# Altium PCB payload.PcbDoc
Units mm, origin at the board's own origin, x right, y up, seen from the top; angles counter-clockwise.
Board outline 30 x 30 mm, 2 copper layers (Top Layer, Bottom Layer); 13 components, 9 nets, 39 pads, 7 vias.
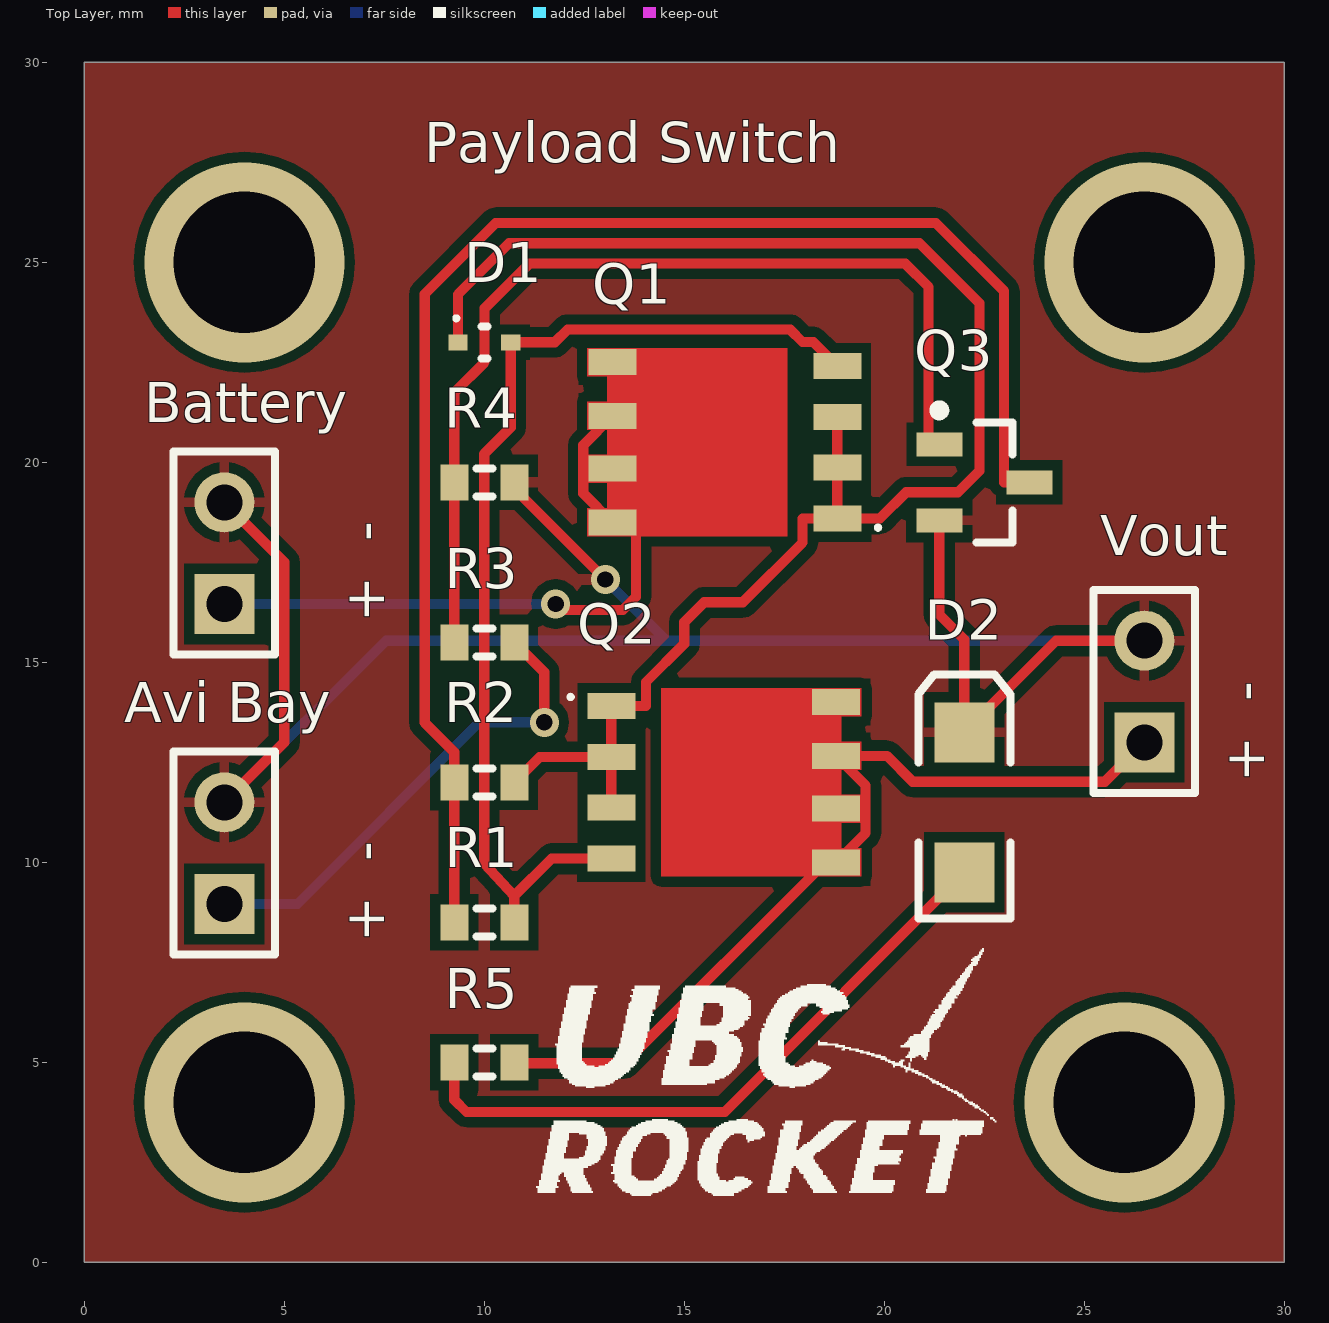
[diagram p0: Top Layer view]
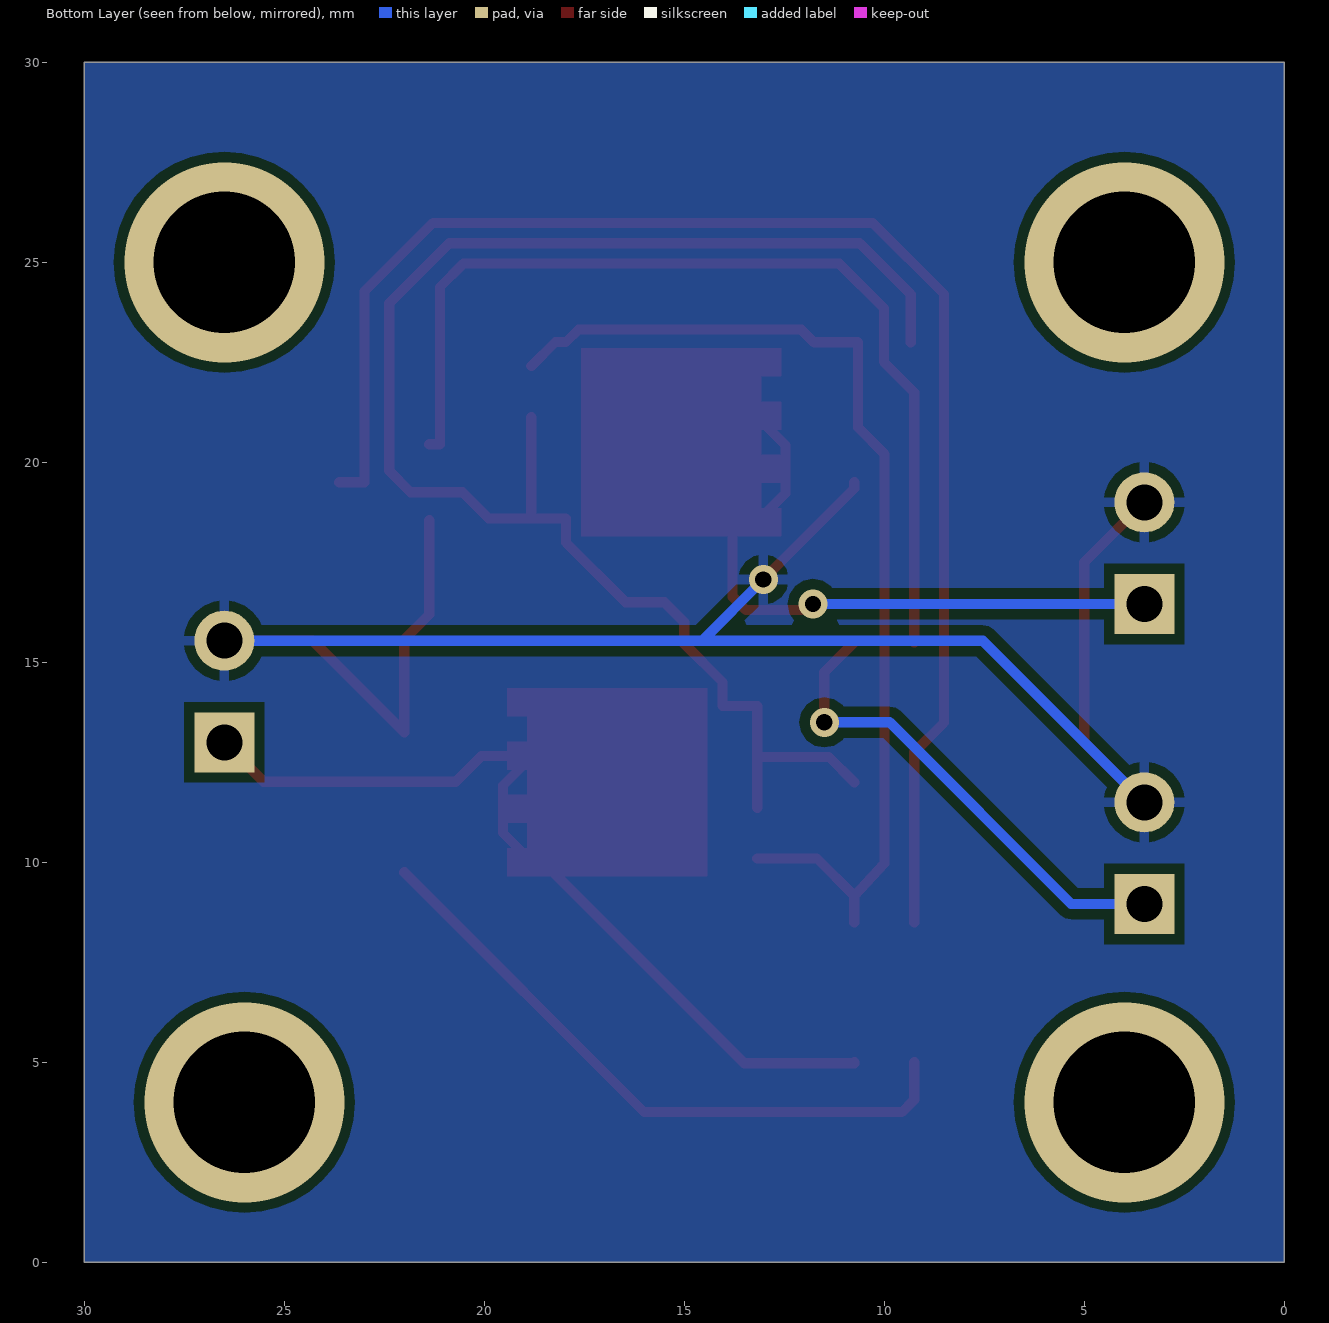
[diagram p1: Bottom Layer view, seen from below]

## Layer stack, top to bottom
Top Solder: solder mask 0.0102, Solder Resist, Dk 3.5
Top Layer: signal copper 0.0356
Dielectric 1: dielectric 0.32, FR-4, Dk 4.8
Bottom Layer: signal copper 0.0356
Bottom Solder: solder mask 0.0102, Solder Resist, Dk 3.5

## Board outline
0,0 30,0 30,30 0,30

## Design rules (kind name [scope] priority, off if disabled: settings)
Clearance [All] p1: gap=0.254 ignorepadtopadclearanceinfootprint=FALSE except(0: Arc-Hole Track-Hole SMDPad-Hole THPad-Hole Via-Hole Fill-Hole Poly-Hole Region-Hole Text-Hole)
PolygonConnect [All] p1: connectstyle=Relief reliefconductorwidth=0.254 reliefentries=4 polygonreliefangle="90 Angle" airgapwidth=0.254
RoutingVias [All] p1: holewidth=0.406 width=0.725 viastyle="Through Hole" minholewidth=0.406 minwidth=0.725 maxholewidth=0.406 maxwidth=0.725
SolderMaskExpansion [All] p1: expansion=0.102
Width [All] p1: maxlimit=0.254 minlimit=0.254 preferedwidth=0.254
30 further rules are at their usual default settings.

## Components (designator, comment, footprint, x,y, rotation, side; value= is the part's Value field where it differs from the comment)
"Avi Bay" "Header 2" HDR1X2 3.5,8.96 r90 top (schematic designator P3)
Battery "Header 2" HDR1X2 3.5,16.46 r90 top (schematic designator P1)
D1 "ZMM5Z18VT1G" ONSC-SOD-523-2-502-01_V 10,23 r0 top
D2 "LED2" 3.2X1.6X1.1 22,11.5 r90 top
Q1 "BSC030P03NS3 G" INF-PG-TDSON-8-1_V 16,20.5 r90 top
Q2 "BSC030P03NS3 G" INF-PG-TDSON-8-1_V 16,12 r270 top
Q3 "BC817-25" SOT-23A_N 22.5,19.5 r0 top
R1 "Res3" J1-0603 10,8.5 r0 top value=100K
R2 "Res3" J1-0603 10,12 r0 top value=100K
R3 "Res3" J1-0603 10,15.5 r180 top value=10K
R4 "Res3" J1-0603 10,19.5 r0 top value=10K
R5 "Res3" J1-0603 10,5 r0 top value=100K
Vout "Header 2" HDR1X2 26.5,13 r90 top (schematic designator P2)

## Footprints (in the part's own frame and the unit in brackets; to place one, negate y for a bottom-side part, rotate by r counter-clockwise, add the part's x,y. Pads: shape width x height; smd on the part's side, far side on the other; paste and mask are expansions set on the pad)
3.2X1.6X1.1 [mm] "SMT LED; 2 Flat Leads"
  rect 1.5x1.5 smd: 1(-1.75,0) 2(1.75,0)
  silkscreen extent -2.9,-1.15 3.2,1.15
HDR1X2 [mm] "Connector; Header; 2 Position"
  rect 1.5x1.5 hole 0.9: 1(0,0)
  round 1.5 hole 0.9: 2(2.54,0)
  silkscreen extent -1.27,-1.27 3.81,1.27
INF-PG-TDSON-8-1_V [mm] "TDSON, 8-Leads, Body 6.15x5.15mm, Pitch 1.27mm"
  rect 0.65x1.2 smd: 1(-1.905,-2.825) 2(-0.635,-2.825) 3(0.635,-2.825) 4(1.905,-2.825) 5(2.007,2.794) 6(0.66,2.794) 7(-0.66,2.794) 8(-2.007,2.794)
  Top Layer region: 0.315,2.925 1.015,2.925 1.015,3.425 0.315,3.425
  Top Layer region: -1.015,2.925 -0.315,2.925 -0.315,3.425 -1.015,3.425
  Top Layer region: 1.65,2.925 2.35,2.925 2.35,3.425 1.65,3.425
  Top Layer region: -2.35,2.925 -1.65,2.925 -1.65,3.425 -2.35,3.425
  Top Layer region: -2.35,2.925 -2.35,-1.575 2.35,-1.575 2.35,2.925
  silkscreen extent -2.23,-3.94 -2.03,-3.74, body extent -2.58,-3.08 2.58,3.08, height 1
J1-0603 [mm] "Chip Resistor, Body 1.6x0.8mm, IPC High Density"
  rect 0.7x0.9 smd: 1(-0.75,0) 2(0.75,0)
  silkscreen extent -0.2,-0.35 0.2,0.35, body extent -0.85,-0.48 0.85,0.48, height 0.9
ONSC-SOD-523-2-502-01_V [mm] "SOD, 2-Leads, Body 1.2x0.8mm"
  rect 0.48x0.4 smd: 1(-0.66,0) 2(0.66,0)
  silkscreen extent -0.75,-0.4 0.07,0.65, body extent -0.6,-0.4 0.6,0.4, height 0.7
SOT-23A_N [mm] "SOT23, 3-Leads, Body 2.9x1.3mm, Pitch 0.95mm, Lead Span 2.3mm, IPC Medium Density"
  rect 1.15x0.6 smd: 1(-1.125,0.95) 2(-1.125,-0.95) 3(1.125,0)
  silkscreen extent -1.25,-1.5 0.7,1.92, body extent -0.7,-1.5 0.7,1.5, height 1.09

## Part data
"Avi Bay" Battery Vout: "Header, 2-Pin", LatestRevisionDate=17-Jul-2002, LatestRevisionNote="Re-released for DXP Platform.", Publisher="Altium Limited"
D1: "Zener Voltage Regulator, 500 mW, 2-Pin SOD-523, Pb-Free, Tape and Reel", Manufacturer="On Semiconductor", ComponentLink1Description="Manufacturer URL", ComponentLink1URL=http://www.onsemi.com/, ComponentLink2Description=Datasheet, ComponentLink2URL=http://www.onsemi.cn/pub_link/Collateral/MM5Z2V4T1-D.PDF, ComponentLink3Description="Package Specification", ComponentLink3URL=http://www.onsemi.com/pub_link/Collateral/502-01.PDF, DatasheetVersion="Rev. 10", Mounting Technology="Surface Mount", PackageDescription="2-Pin SOD, Body 1.2 x 0.8 mm", PackageReference=SOD-523-2-502-01, PackageVersion="Rev. E, 09/2010", Packing="Tape and Reel", PartNumber=ZMM5Z18VT1G, P Max (W)=0.5, RoHS=Pb-Free, VZ Typ (V)=18
D2: "Typical RED, GREEN, YELLOW, AMBER GaAs LED", LatestRevisionDate=17-Jul-2002, LatestRevisionNote="Re-released for DXP Platform.", PackageDescription="SM LED; 2 Flat Leads", PackageReference=3.2X1.6X1.1, PackageVersion=Feb-2002, Published=8-Jun-2000, Publisher="Altium Limited"
Q1 Q2: "P-Channel OptiMOS P3 Power-Transistor, -30 V VDS, -100 A ID, -55 to 150 degC, PG-TDSON-8-1, Reel, Green", Manufacturer=Infineon, Supplier Part Number 1=726-BSC030P03NS3G, ComponentLink1Description="Manufacturer URL", ComponentLink1URL=http://www.infineon.com/, ComponentLink2Description=Datasheet, ComponentLink2URL=http://www.infineon.com/dgdl/BSC030P03NS3+G_2.1.pdf?folderId=db3a304314dca38901154a72e3951a65&fileId=db3a30431d8a6b3c011d90d084910435, ComponentLink3Description="Package Specification", ComponentLink3URL=http://www.infineon.com/cms/packages/SMD_-_Surface_Mounted_Devices/P-PG-TDSON/P-PG-TDSON-08-01x_2x_3.html?__locale=en, DatasheetVersion="Rev. 2.1", Green=TRUE, Halogen-free=TRUE, ID (max)="-100 A", IDpuls (max)="-200 A", Mounting Technology="Surface Mount", PackageDescription="8-Pin Plastic (Green) Thin Dual Small Outline Non-Leaded Package, 5.15 x 5.9 mm Body, 1.27 mm Pitch", PackageReference=PG-TDSON-8-1, Packing=Reel, PartNumber="BSC030P03NS3 G", Pto t (max)="125 W", QG="137 nC", RDS (on) (max)="3 mOhm", Rth="1 K/W", RthJC (max)="1 K/W", Supplier 1=Mouser, Supplier 2=Digi-Key, Supplier 3=Digi-Key, Supplier 4=Digi-Key, Supplier Part Number 2="BSC030P03NS3 GTR-ND", Supplier Part Number 3="BSC030P03NS3 GCT-ND", Supplier Part Number 4="BSC030P03NS3 GDKR-ND", VDS (max)="-30 V", VGS(th) (max)="-1.9 V", VGS(th) (min)="-3.1 V"
Q3: "NPN General Purpose Amplifier", ComponentLink1Description="Manufacturer Link", ComponentLink1URL=http://www.fairchildsemi.com/, ComponentLink2Description="Discontinuation Notice", ComponentLink2URL=http://www.fairchildsemi.com/obsolete/obs.jsp, DatasheetVersion=1997, LatestRevisionDate=20-Nov-2009, LatestRevisionNote="IPC-7351 Footprint Added.", PackageDescription="3-Pin SOT-23 Package 0.95 mm Pitch, 2.3 mm Lead Span", PackageReference=SOT-23A, PackageVersion=Sep-1998, Published=8-Jun-2000, Publisher="Altium Limited"
R1 R2 R3 R4 R5: "Resistor", LatestRevisionDate=29-May-2009, LatestRevisionNote="IPC-7351 Footprint Added.", PackageDescription="Chip Resistor", PackageReference=J1-0603, Published=8-Jun-2000, Publisher="Altium Limited"

## Via types
v1: diameter 5, hole 3.54, Top Layer to Bottom Layer, 4 vias
v2: diameter 0.725, hole 0.406, Top Layer to Bottom Layer, 3 vias

## Nets (pads, with @x,y where several pads share a name; then routed paths per layer and width w, separated by ;. In a path a pad name is that pad's centre, name@x,y a point inside that pad or via, vN(x,y) a via of type N, cw(c..) or ccw(c..) an arc to the next point about the centre after c; other vN are vias at no path point)
GND: "Avi Bay.2" Battery.2 D2.2 Q3.2 R4.2 Vout.2 | length 50
  Top Layer w0.254: 3.5,11.5 5,13 5,17.5 Battery.2 ; R4.2 10.75,19.344 v2(13.025,17.069) ; Q3.2 21.375,16.195 22,15.57 D2.2 24.29,15.54 Vout.2
  Bottom Layer w0.254: 3.5,11.5 7.54,15.54 14.554,15.54 ; v2(13.025,17.069) 14.554,15.54 ; Vout.2 14.554,15.54
NetD1_1: D1.1 Q1.1 Q1.2 Q1.3 Q2.1 Q2.2 Q2.3 R2.2 | length 40
  Top Layer w0.254: D1.1 9.34,24.199 10.617,25.476 20.879,25.476 22.377,23.978 22.377,19.787 21.844,19.253 20.546,19.253 19.888,18.595 Q1.1 ; R2.2 11.385,12.635 Q2.2 ; Q2.3 Q2.2 ; Q1.3 Q1.2 Q1.1 ; Q2.2 Q2.1 14.044,13.905 14.044,14.508 15,15.464 15,16 15.5,16.5 16.464,16.5 17.956,17.992 17.956,18.595 Q1.1
NetD1_2: D1.2 Q1.4 Q2.4 R1.2 | length 26.6
  Top Layer w0.254: R1.2 10.75,9.161 ; Q2.4 11.684,10.095 10.75,9.161 ; Q1.4 18.222,23.008 17.956,23.008 17.647,23.317 12.077,23.317 11.76,23 D1.2 10.66,20.873 9.998,20.211 9.998,9.972 10.75,9.161
NetD2_1: D2.1 R5.1 | length 16.3
  Top Layer w0.254: R5.1 9.25,4.064 9.555,3.759 16.009,3.759 D2.1
NetQ3_1: Q3.1 R3.2 R4.1 | length 24.7
  Top Layer w0.254: R3.2 R4.1 9.25,21.747 10.008,22.504 10.008,23.851 11.125,24.968 20.523,24.968 21.107,24.384 21.107,20.45 Q3.1
ON: "Avi Bay.1" R3.1 | length 12.2
  Top Layer w0.254: R3.1 11.5,14.75 v2(11.5,13.5)
  Bottom Layer w0.254: 3.5,8.96 5.328,8.96 9.868,13.5 v2(11.5,13.5)
SW: Q3.3 R1.1 R2.1 | length 37.3
  Top Layer w0.254: R1.1 R2.1 9.25,12.751 8.509,13.492 8.509,24.206 10.287,25.984 21.285,25.984 22.994,24.275 22.994,19.5 Q3.3
Vin: Battery.1 Q1.5 Q1.6 Q1.7 Q1.8 | length 18.9
  Top Layer w0.254: v2(11.785,16.46) 11.938,16.307 13.462,16.307 13.792,16.637 13.792,18.493 Q1.8 12.471,19.228 12.471,20.426 Q1.6 ; Q1.7 Q1.6 ; Q1.5 Q1.6
  Bottom Layer w0.254: Battery.1 v2(11.785,16.46)
Vout: Q2.5 Q2.6 Q2.7 Q2.8 R5.2 Vout.1 | length 28.4
  Top Layer w0.254: R5.2 10.75,4.978 13.502,4.978 Q2.5@18.517,9.993 ; Q2.6 Q2.5 ; Q2.8 18.059,14.007 18.059,9.993 Q2.5@18.517,9.993 ; Vout.1 25.514,12.014 20.712,12.014 20.066,12.66 Q2.7 19.533,11.922 19.533,10.732 Q2.5 ; Q2.5@18.517,9.993 Q2.5
copper on no net:
  other v1: 4,4 26,4 4,25 26.5,25

## Polygon pours and split planes (outlines as drawn)
GND on Bottom Layer "bottom" (solid, pour order 2): 0,0 30,0 30,30 0,30
GND on Top Layer "Top Layer-No Net" (solid, pour order 3): 0,0 30,0 30,30 0,30

## Silkscreen, mask and mechanical layers (free items; w line width, h text height)
Top Overlay:
  drawing of 12 lines, arcs and shapes, not listed
  text "Payload Switch" at 8.5,27.5 h1
  text "+  -" at 7.5,16 h1 r90
  text "+  -" at 29.5,12 h1 r90
  text "+  -" at 7.5,8 h1 r90
Mechanical 1:
  the board outline again, w0.254